# EAGLE board SCHEMATIC_R1 (EAGLE 9.6.2)

Size 54.28 x 60.95 mm. Coordinates in mm from the lower left corner, seen from the top.
Outline: 0,0 54.28,0 54.28,60.95 0,60.95 0,0
Copper layers (1*16): Top 0.035mm / dielectric 1.5mm / Bottom 0.035mm
Design rules "PCBWay_2L_152um-Track *": minimum track width 6mil, minimum drill 0.3mm, track to track 6mil, track to pad 6mil, pad to pad 6mil, via to via 6mil, smd to smd 0mil, copper to edge 0.3mm, drill to drill 10mil, minimum pad ring 6mil, minimum via ring 0.1mm, stop-mask expansion 2mil, vias tented up to drill 0.45mm, thermal gap 0.2mm

## Footprints (pad centres in the part's own frame; a part is rotated, then mirrored left to right if it is on the bottom)
PTS810 = smd 1.05 x 0.65: 1 -2.075,1.075; 2 2.075,1.075; 3 -2.075,-1.075; 4 2.075,-1.075
C0603 = smd 1.1 x 1: 1 -0.85,0; 2 0.85,0
C0805 = smd 1.3 x 1.5: 1 -0.95,0; 2 0.95,0
CON6_2X3_TU_HTS_SAI = drill 0.711 pad 1.27: 1 -2.54,-1.27; 2 -2.54,1.27; 3 0,-1.27; 4 0,1.27; 5 2.54,-1.27; 6 2.54,1.27
0603 = smd 0.8 x 0.8: A+ -0.75,0; C- 0.75,0
NUCLEO-64 = drill 1.1 pad 1.85 square: CN5-1 59.13,24.884; CN6-1 10.87,38.6; CN7-1 3.25,48.76; CN8-1 10.87,15.74; CN9-1 59.13,3.04; CN10-1 64.21,48.735 | drill 1.1 pad 1.85: CN5-2 59.13,27.424; CN5-3 59.13,29.964; CN5-4 59.13,32.504; CN5-5 59.13,35.044; CN5-6 59.13,37.584; CN5-7 59.13,40.124; CN5-8 59.13,42.664; CN5-9 59.13,45.204; CN5-10 59.13,47.744; CN6-2 10.87,36.06; CN6-3 10.87,33.52; CN6-4 10.87,30.98; CN6-5 10.87,28.44; CN6-6 10.87,25.9; CN6-7 10.87,23.36; CN6-8 10.87,20.82; CN7-2 5.79,48.76; CN7-3 3.25,46.22; CN7-4 5.79,46.22; CN7-5 3.25,43.68; CN7-6 5.79,43.68; CN7-7 3.25,41.14; CN7-8 5.79,41.14; CN7-9 3.25,38.6; CN7-10 5.79,38.6; CN7-11 3.25,36.06; CN7-12 5.79,36.06; CN7-13 3.25,33.52; CN7-14 5.79,33.52; CN7-15 3.25,30.98; CN7-16 5.79,30.98; CN7-17 3.25,28.44; CN7-18 5.79,28.44; CN7-19 3.25,25.9; CN7-20 5.79,25.9; CN7-21 3.25,23.36; CN7-22 5.79,23.36; CN7-23 3.25,20.82; CN7-24 5.79,20.82; CN7-25 3.25,18.28; CN7-26 5.79,18.28; CN7-27 3.25,15.74; CN7-28 5.79,15.74; CN7-29 3.25,13.2; CN7-30 5.79,13.2; CN7-31 3.25,10.66; CN7-32 5.79,10.66; CN7-33 3.25,8.12; CN7-34 5.79,8.12; CN7-35 3.25,5.58; CN7-36 5.79,5.58; CN7-37 3.25,3.04; CN7-38 5.79,3.04; CN8-2 10.87,13.2; CN8-3 10.87,10.66; CN8-4 10.87,8.12; CN8-5 10.87,5.58; CN8-6 10.87,3.04; CN9-2 59.13,5.58; CN9-3 59.13,8.12; CN9-4 59.13,10.66; CN9-5 59.13,13.2; CN9-6 59.13,15.74; CN9-7 59.13,18.28; CN9-8 59.13,20.82; CN10-2 66.75,48.735; CN10-3 64.21,46.195; CN10-4 66.75,46.195; CN10-5 64.21,43.655; CN10-6 66.75,43.655; CN10-7 64.21,41.115; CN10-8 66.75,41.115; CN10-9 64.21,38.575; CN10-10 66.75,38.575; CN10-11 64.21,36.035; CN10-12 66.75,36.035; CN10-13 64.21,33.495; CN10-14 66.75,33.495; CN10-15 64.21,30.955; CN10-16 66.75,30.955; CN10-17 64.21,28.415; CN10-18 66.75,28.415; CN10-19 64.21,25.875; CN10-20 66.75,25.875; CN10-21 64.21,23.335; CN10-22 66.75,23.335; CN10-23 64.21,20.795; CN10-24 66.75,20.795; CN10-25 64.21,18.255; CN10-26 66.75,18.255; CN10-27 64.21,15.715; CN10-28 66.75,15.715; CN10-29 64.21,13.175; CN10-30 66.75,13.175; CN10-31 64.21,10.635; CN10-32 66.75,10.635; CN10-33 64.21,8.095; CN10-34 66.75,8.095; CN10-35 64.21,5.555; CN10-36 66.75,5.555; CN10-37 64.21,3.015; CN10-38 66.75,3.015 | hole 3.175: 59.13,51.3; 10.87,52.57; 43.89,0.5
M0805 = smd 1.3 x 1.6: 1 -0.95,0; 2 0.95,0
R0805 = smd 1.3 x 1.5: 1 -0.95,0; 2 0.95,0
TESTPOINT = smd 1.27 x 1.27: TP 0,0
SON65P200X200X75-6N = smd 0.9 x 0.4: 1 -0.645,0.65; 2 -0.645,0; 3 -0.645,-0.65; 4 0.655,-0.65; 5 0.655,0; 6 0.655,0.65
ESP32C3WROOM02N4 = smd 1.5 x 0.9: 1 -9.71,6.2; 2 -9.71,4.7; 3 -9.71,3.2; 4 -9.71,1.7; 5 -9.71,0.2; 6 -9.71,-1.3; 7 -9.71,-2.8; 8 -9.71,-4.3; 9 -9.71,-5.8; 10 7.79,-5.8; 11 7.79,-4.3; 12 7.79,-2.8; 13 7.79,-1.3; 14 7.79,0.2; 15 7.79,1.7; 16 7.79,3.2; 17 7.79,4.7; 18 7.79,6.2 | smd 0.7 x 0.7: 19 0,0; 20 1.1,0; 21 1.1,1.1; 22 0,1.1; 23 -1.1,1.1; 24 -1.1,0; 25 -1.1,-1.1; 26 0,-1.1; 27 1.1,-1.1

## Placement (x,y rotation side)
BTN1  PTS810 SJM 250 SMTR LFS  [PTS810]  15.94,8.2 0 top
C1  1uF 0603  [C0603]  19.33,38.57 90 top
C2  0.1uF 0603  [C0603]  35.83,31.57 180 top
C3  10uF  [C0805]  28.83,34.07 180 top
C4  0.1uF 0603  [C0603]  35.83,34.07 180 top
C5  10uF  [C0805]  28.83,31.07 180 top
CONN1  TD-103-T-A  [CON6_2X3_TU_HTS_SAI]  14.79,54.67 270 top
LED1  LTST-C191KGKT  [0603]  38.97,11.2 90 top
LED2  LTST-C191KRKT  [0603]  34.05,11.2 90 top
M1  NUCLEO-L452RE  [NUCLEO-64]  -7.62,2.54 0 top
R1  2kOhm  [M0805]  11.4,37.07 0 top
R2  0 Ohm  [M0805]  18.4,34.53 180 top
R3  2kOhm  [M0805]  11.4,39.55 0 top
R4  2kOhm  [M0805]  11.4,34.55 180 top
R5  0 Ohm  [M0805]  18.33,48.07 180 top
R6  0 Ohm  [M0805]  9.2,10.94 180 top
R7  10kOhm  [R0805]  43.31,34.07 180 top
R8  2kOhm  [M0805]  9.19,6.47 0 top
R9  2kOhm  [M0805]  38.93,15.19 90 top
R10  2kOhm  [M0805]  33.93,15.19 90 top
R11  0 Ohm  [M0805]  23.19,18.67 180 top
R12  0 Ohm  [M0805]  23.31,16.17 180 top
R13  0 Ohm  [M0805]  13.19,46.92 270 top
R14  0 Ohm  [M0805]  10.77,46.92 270 top
R15  0 Ohm  [M0805]  18.33,45.29 0 top
R16  0 Ohm  [M0805]  10.97,18.32 180 top
R17  0 Ohm  [M0805]  11.09,15.82 180 top
R18  10kOhm  [R0805]  43.31,31.07 180 top
R19  10kOhm  [R0805]  43.31,28.07 180 top
R20  0 Ohm  [M0805]  23.45,10.32 0 top
R21  0 Ohm  [M0805]  43.83,14.32 0 top
TP1  [TESTPOINT]  13.16,26.78 0 top
TP2  [TESTPOINT]  22.34,3.4 0 top
U1  APDS-9306-065  [SON65P200X200X75-6N]  15.88,38.03 0 top
U5  ESP32-C3-WROOM-02-N4  [ESP32C3WROOM02N4]  38.33,43.57 0 top

## Library data of the parts
BTN1 = PTS810_SJM_250_SMTR_LFS-C&K; PARTNO: PTS810 SJM 250 SMTR LFS
C1 = rcl; PARTNO: GCM188R71C105KA64D; SPICEPREFIX: C
C2 C4 = rcl; PARTNO: GRM188R72A104KA35D; SPICEPREFIX: C
C3 C5 = rcl; SPICEPREFIX: C
CONN1 = TD-103-T-A; COPYRIGHT: Copyright (C) 2023 Ultra Librarian. All rights reserved.; MANUFACTURER_PART_NUMBER: TD-103-T-A; MFR_NAME: Samtec Inc; PARTNO: TD-103-T-A
LED1 = LTST-C191KRKT-C&K; PARTNO: LTST-C191KGKT
LED2 = LTST-C191KRKT-C&K; PARTNO: LTST-C191KRKT
M1 = NUCLEO-L452RE
R1 R3 R4 R8-R10 = rcl; PARTNO: RMCF0805FT2K00; SPICEPREFIX: R
R2 R5 R6 R11-R17 R20 R21 = rcl; PARTNO: RMCF0805ZT0R00; SPICEPREFIX: R
R7 R18 R19 = rcl; PARTNO: RMCF0805JT10K0; SPICEPREFIX: R
TP1 TP2 = TEST_POINT
U1 = APDS-9306-065 - Avago Technologies; MANUFACTURER: AVAGO TECHNOLOGIES; PARTNO: APDS-9306-065; STANDARD: IPC-7351B
U5 = ESP32-C3-WROOM-02-N4; DESCRIPTION: WiFi Modules (802.11) (Engineering Samples) SMD module, ESP32-C3, 4MB SPI flash, PCB antenna, -40 C +85 C; HEIGHT: 3.35mm; MANUFACTURER_NAME: Espressif Systems; MANUFACTURER_PART_NUMBER: ESP32-C3-WROOM-02-N4; MOUSER_PART_NUMBER: 356-ESP32C3WROOM02N4; MOUSER_PRICE-STOCK: https://www.mouser.co.uk/ProductDetail/Espressif-Systems/ESP32-C3-WROOM-02-N4?qs=stqOd1AaK7%2FqjTZKEOgfUg%3D%3D; PARTNO: ESP32-C3-WROOM-02-N4

## Nets
+3V3: M1.CN6-4 M1.CN7-16 R2.2 R5.2 R6.2 R15.2 TP1.TP
+5V: M1.CN6-5 M1.CN7-18
AGND: M1.CN10-32
AVDD: M1.CN5-8 M1.CN10-7
GND: C1.2 C2.2 C3.2 C4.2 C5.2 CONN1.5 M1.CN5-7 M1.CN6-6 M1.CN6-7 M1.CN7-8 M1.CN7-19 M1.CN7-20 M1.CN7-22 M1.CN10-9 M1.CN10-20 R8.1 R9.2 R10.2 U1.6 U5.9 U5.19 U5.20 U5.21 U5.22 U5.23 U5.24 U5.25 U5.26 U5.27
IOREF: M1.CN6-2
MESP_EN: M1.CN8-1 R16.2
N$1: M1.CN5-10 R20.2
N$2: C1.1 R1.2 R2.1 R3.2 R4.2 U1.3
N$3: M1.CN9-8 R1.1 U1.4
N$4: LED2.A+ M1.CN5-2
N$5: BTN1.3 R8.2
N$6: R18.1 U5.16
N$7: BTN1.1 R6.1
N$8: M1.CN9-1 R11.1
N$9: M1.CN9-2 R12.1
N$10: BTN1.4 R20.1 TP2.TP
N$11: M1.CN5-3 R21.2
N$12: LED2.C- R10.1
N$13: R11.2 R13.2 U5.12
N$14: LED1.C- R9.1
N$15: R12.2 R14.2 U5.11
N$16: CONN1.2 R13.1
N$17: CONN1.6 R14.1
N$18: CONN1.4 U5.8
N$19: CONN1.1 R15.1
N$20: R19.1 U5.7
N$21: C2.1 R7.1 R16.1 R17.1 U5.2
N$22: C3.1 C4.1 C5.1 R5.1 R7.2 R18.2 R19.2 U5.1
N$23: LED1.A+ R21.1
PESP_EN: CONN1.3 R17.2
SENSOR_SCL: M1.CN5-1 R3.1 U1.1
SENSOR_SDA: M1.CN9-3 R4.1 U1.2
U5V: M1.CN10-8
VBAT: M1.CN7-33
VDD: M1.CN7-5
VIN: M1.CN6-8 M1.CN7-24

## Tracks (layer width: path | path; a pad name or v marks a point on that pad's centre or on a via)
+3V3  (6 unrouted)
+5V  (1 unrouted)
AVDD  (1 unrouted)
GND  (28 unrouted)
MESP_EN  (1 unrouted)
N$1  (1 unrouted)
N$2  (5 unrouted)
N$3  (2 unrouted)
N$4  (1 unrouted)
N$5  (1 unrouted)
N$6  (1 unrouted)
N$7  (1 unrouted)
N$8  (1 unrouted)
N$9  (1 unrouted)
N$10  (2 unrouted)
N$11  (1 unrouted)
N$12  (1 unrouted)
N$13  (2 unrouted)
N$14  (1 unrouted)
N$15  (2 unrouted)
N$16  (1 unrouted)
N$17  (1 unrouted)
N$18  (1 unrouted)
N$19  (1 unrouted)
N$20  (1 unrouted)
N$21  (4 unrouted)
N$22  (7 unrouted)
N$23  (1 unrouted)
PESP_EN  (1 unrouted)
SENSOR_SCL  (2 unrouted)
SENSOR_SDA  (2 unrouted)
VIN  (1 unrouted)